# EAGLE board mmbuddy (EAGLE 9.6.2)
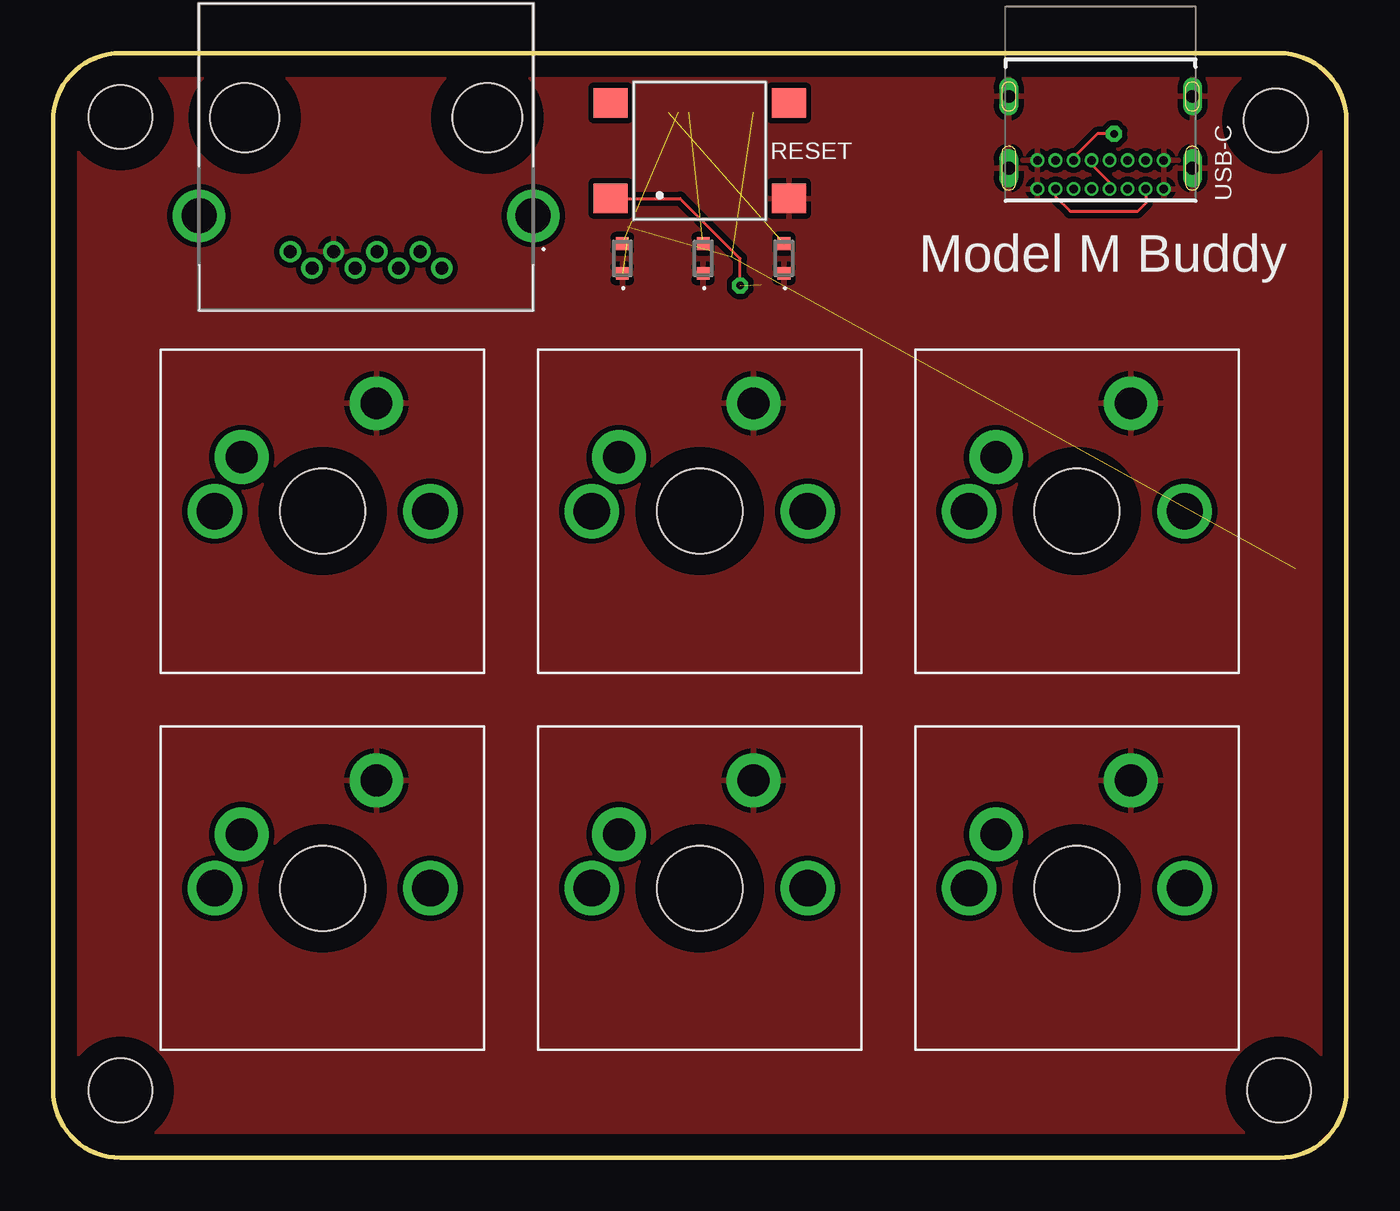
[diagram p0: board, top side]
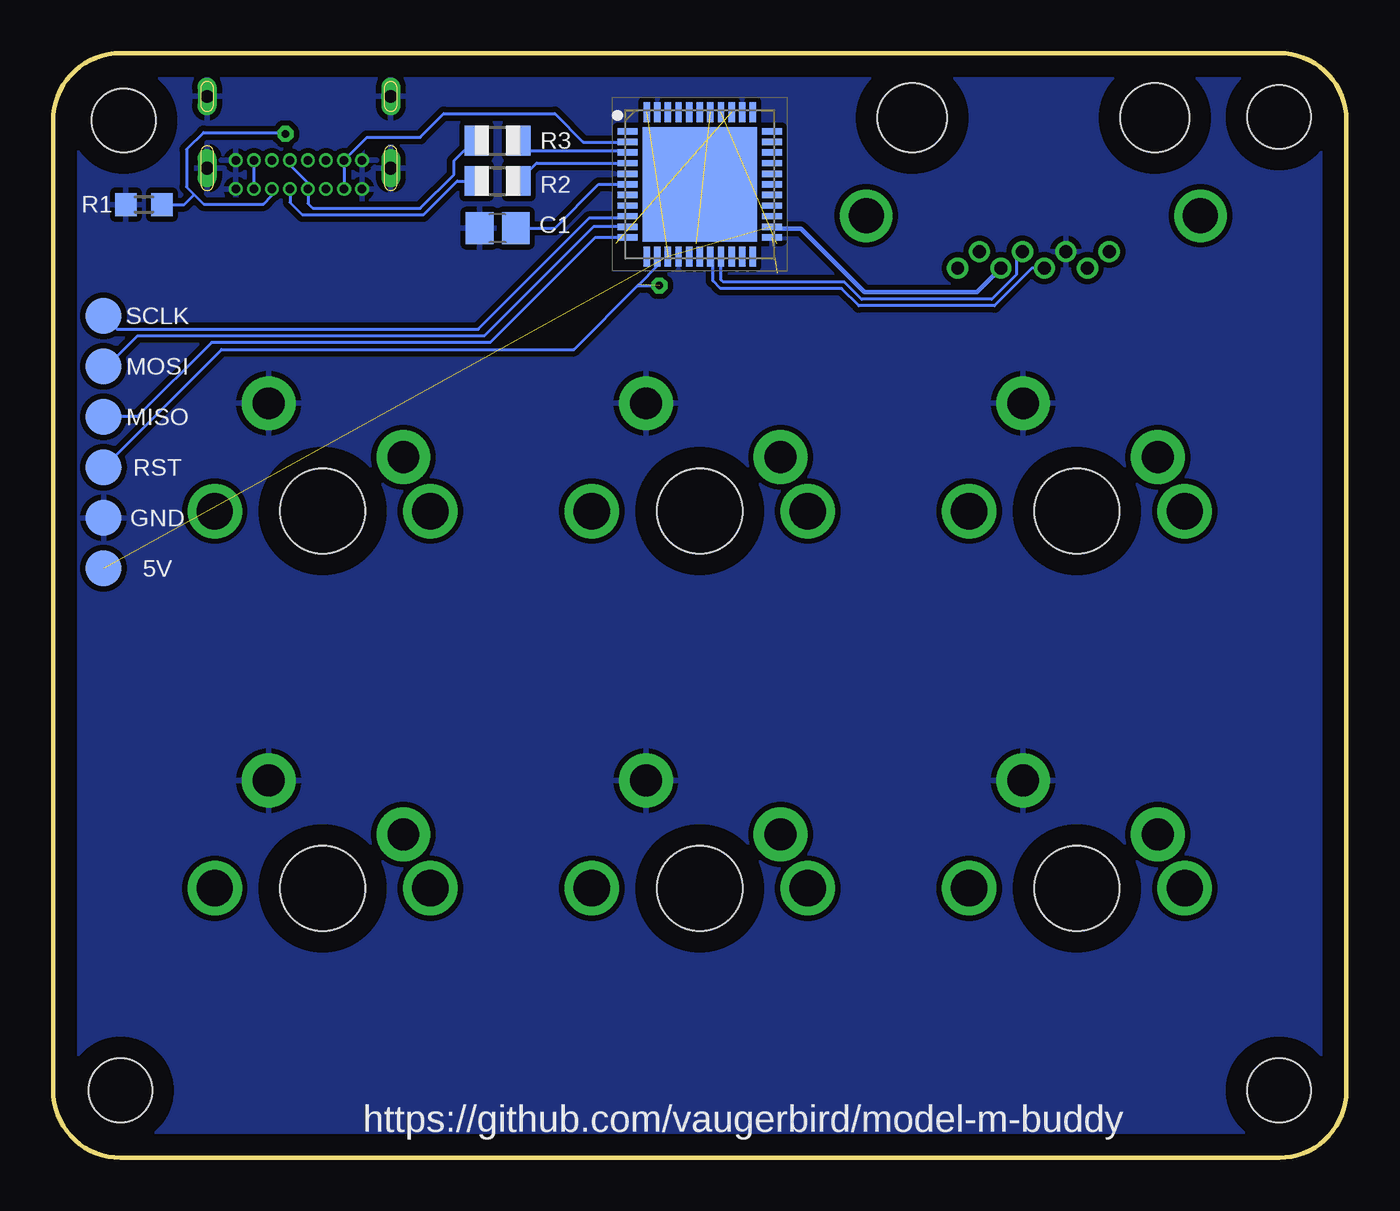
[diagram p1: board, bottom side, seen from below]

Size 60.96 x 52.07 mm. Coordinates in mm from the lower left corner, seen from the top.
Outline: 3.18,0 57.79,0 arc90 60.96,3.17 60.96,48.9 arc90 57.79,52.07 3.18,52.07 arc90 0,48.9 0,3.17 arc90 3.18,0
Copper layers (1*16): Top 0.035mm / dielectric 1.5mm / Bottom 0.035mm
Design rules "default *": minimum track width 6mil, minimum drill 0.35mm, track to track 6mil, track to pad 6mil, pad to pad 6mil, via to via 6mil, smd to smd 6mil, copper to edge 40mil, drill to drill 6mil, minimum pad ring 4mil, minimum via ring 8mil, stop-mask expansion 4mil, vias tented up to drill 0mil, thermal gap 10mil
Holes 3 mm at 57.79,3.17 57.63,48.9 3.18,3.17 3.18,49.05

## Footprints (pad centres in the part's own frame; a part is rotated, then mirrored left to right if it is on the bottom)
TP17R = smd 1.7 x 1.7: TP 0,0
C0805 = smd 1.3 x 1.5: 1 -0.85,0; 2 0.85,0
155060GS75300 = smd 0.6 x 0.6: 1 -0.7,0; 2 0.7,0
QFN50P700X700X100-45N = smd 0.95 x 0.3: 1 -3.4,2.5; 2 -3.4,2; 3 -3.4,1.5; 4 -3.4,1; 5 -3.4,0.5; 6 -3.4,0; 7 -3.4,-0.5; 8 -3.4,-1; 9 -3.4,-1.5; 10 -3.4,-2; 11 -3.4,-2.5; 23 3.4,-2.5; 24 3.4,-2; 25 3.4,-1.5; 26 3.4,-1; 27 3.4,-0.5; 28 3.4,0; 29 3.4,0.5; 30 3.4,1; 31 3.4,1.5; 32 3.4,2; 33 3.4,2.5 | smd 0.3 x 0.95: 12 -2.5,-3.4; 13 -2,-3.4; 14 -1.5,-3.4; 15 -1,-3.4; 16 -0.5,-3.4; 17 0,-3.4; 18 0.5,-3.4; 19 1,-3.4; 20 1.5,-3.4; 21 2,-3.4; 22 2.5,-3.4; 34 2.5,3.4; 35 2,3.4; 36 1.5,3.4; 37 1,3.4; 38 0.5,3.4; 39 0,3.4; 40 -0.5,3.4; 41 -1,3.4; 42 -1.5,3.4; 43 -2,3.4; 44 -2.5,3.4 | smd 5.4 x 5.4: 45 0,0
SS60300046 = drill 0.61 pad 1: 1 0,0; 2 1.02,-0.77; 3 -1.02,-0.77; 4 -3.06,-0.77; 5 -2.04,0; 6 -4.08,0; 7 -6.12,0; 8 -5.1,-0.77 | drill 1.65 pad 2.475: MH1 -10.425,1.7; MH2 5.325,1.7 | hole 3.25: 3.165,6.32; -8.265,6.32
R0603 = smd 1 x 1.1: 1 -0.85,0; 2 0.85,0
R0805 = smd 1.1 x 1.4: 1 -1,0; 2 1,0
LL3303F065QG = smd 1.6 x 1.4: 1 -4.2,-2.25; 2 4.2,-2.25; 3 -4.2,2.25; 4 4.2,2.25
CHERRY-MX = drill 1.714 pad 1.93: P$3 -5.08,0; P$4 5.08,0 | drill 1.5 pad 2.54: SW1 -3.81,2.54; SW2 2.54,5.08 | hole 4: 0,0
GCT_USB4085-GF-A_REVA = drill 0.4 pad 0.65: A1 -2.975,4.025; A4 -2.125,4.025; A5 -1.275,4.025; A6 -0.425,4.025; A7 0.425,4.025; A8 1.275,4.025; A9 2.125,4.025; A12 2.975,4.025; B1 2.975,2.675; B4 2.125,2.675; B5 1.275,2.675; B6 0.425,2.675; B7 -0.425,2.675; B8 -1.275,2.675; B9 -2.125,2.675; B12 -2.975,2.675 | drill 0.6 long: P1 -4.325,3.045; P2 4.325,3.045; P3 4.325,-0.335; P4 -4.325,-0.335

## Placement (x,y rotation side)
5V  TPTP17R  [TP17R]  58.58,27.78 0 bottom
C1  1uF  [C0805]  40.01,43.82 180 bottom
CAPS  155060GS75300  [155060GS75300]  30.64,42.39 90 top
GND  TPTP17R  [TP17R]  58.58,30.16 0 bottom
IC2  ATMEGA32U4-MU  [QFN50P700X700X100-45N]  30.48,45.88 0 bottom
J2  SS-60300-046  [SS60300046]  17.3,42.7 0 top
MISO  TPTP17R  [TP17R]  58.58,34.93 0 bottom
MOSI  TPTP17R  [TP17R]  58.58,37.31 0 bottom
NUM  155060GS75300  [155060GS75300]  26.83,42.39 90 top
R1  5.1k  [R0603]  56.67,44.93 180 bottom
R2  22Ω  [R0805]  40.01,46.04 0 bottom
R3  22Ω  [R0805]  40.01,47.94 0 bottom
RESET  LL3303F065QG  [LL3303F065QG]  30.48,47.47 0 top
RST  TPTP17R  [TP17R]  58.58,32.54 0 bottom
SCLK  TPTP17R  [TP17R]  58.58,39.69 0 bottom
SCROLL  155060GS75300  [155060GS75300]  34.45,42.39 90 top
SW1  CHERRY-MX  [CHERRY-MX]  12.7,30.48 0 top
SW2  CHERRY-MX  [CHERRY-MX]  30.48,30.48 0 top
SW3  CHERRY-MX  [CHERRY-MX]  48.26,30.48 0 top
SW4  CHERRY-MX  [CHERRY-MX]  12.7,12.7 0 top
SW5  CHERRY-MX  [CHERRY-MX]  30.48,12.7 0 top
SW6  CHERRY-MX  [CHERRY-MX]  48.26,12.7 0 top
USB-C  USB4085-GF-A_REVA  [GCT_USB4085-GF-A_REVA]  49.37,49.69 180 top

## Library data of the parts
5V GND MISO MOSI RST SCLK = testpad
C1 R1-R3 = adafruit
CAPS NUM SCROLL = SamacSys_Parts; DESCRIPTION: WURTH ELEKTRONIK - 155060GS75300 - LED, Green, SMD, 0603 [1608 Metric], 20 mA, 3.2 V, 525 nm; HEIGHT: 1.18mm; MANUFACTURER_NAME: Wurth Elektronik; MANUFACTURER_PART_NUMBER: 155060GS75300; MOUSER_PART_NUMBER: 710-155060GS75300; MOUSER_PRICE-STOCK: https://www.mouser.co.uk/ProductDetail/Wurth-Elektronik/155060GS75300/?qs=GedFDFLaBXH9gWG%252BJzMHAg%3D%3D
IC2 = SamacSys_Parts; DESCRIPTION: MCU 8-bit ATmega AVR RISC 32KB Flash Atmel ATMEGA32U4-MU, 8bit AVR Microcontroller, 16MHz, 32 kB Flash, 44-Pin QFN; HEIGHT: 1mm; MANUFACTURER_NAME: Microchip; MANUFACTURER_PART_NUMBER: ATMEGA32U4-MU; MOUSER_PART_NUMBER: 556-ATMEGA32U4-MU; MOUSER_PRICE-STOCK: https://www.mouser.co.uk/ProductDetail/Microchip-Technology-Atmel/ATMEGA32U4-MU?qs=JV7lzlMm3yJYRpi0cY3cKw%3D%3D
J2 = SamacSys_Parts; DESCRIPTION: Ethernet Connectors R ANG SHIELDED JACK ;SS60300046; HEIGHT: 14.33mm; MANUFACTURER_NAME: Bel; MANUFACTURER_PART_NUMBER: SS-60300-046; MOUSER_PART_NUMBER: 530-SS-60300-046
RESET = SamacSys_Parts; DESCRIPTION: Pushbutton Switches 50mA 12VDC F065 7.0mm Gull Wing; HEIGHT: 3.4mm; MANUFACTURER_NAME: E-Switch; MANUFACTURER_PART_NUMBER: LL3303F065QG; MOUSER_PART_NUMBER: 612-LL3303F065QG; MOUSER_PRICE-STOCK: https://www.mouser.co.uk/ProductDetail/E-Switch/LL3303F065QG?qs=QtyuwXswaQjocAyEnLyPSg%3D%3D
SW1-SW6 = cherrymx
USB-C = USB4085-GF-A_REVA; AVAILABILITY: Warning; DESCRIPTION: USB-C (USB TYPE-C) USB 2.0 Receptacle Connector 24 (16+8 Dummy) Position Through Hole, Right Angle; MF: Global Connector Technology; MP: USB4085-GF-A; PACKAGE: Package; PRICE: None; PURCHASE-URL: https://pricing.snapeda.com/search/part/USB4085-GF-A/?ref=eda

## Nets
CAPS: CAPS.2 IC2.38
CC: R1.1 USB-C.A5 USB-C.B5
CLK: IC2.19 J2.5
D+: R2.1 USB-C.A6 USB-C.B6
D+RES: IC2.4 R2.2
D-: R3.1 USB-C.A7 USB-C.B7
D-RES: IC2.3 R3.2
DATA: IC2.18 J2.4
GND: C1.2 CAPS.1 GND.TP IC2.5 IC2.15 IC2.23 IC2.35 IC2.43 J2.6 NUM.1 R1.2 RESET.2 SCROLL.1 SW1.SW2 SW2.SW2 SW3.SW2 SW4.SW2 SW5.SW2 SW6.SW2 USB-C.A1 USB-C.A12 USB-C.B1 USB-C.B12 USB-C.P1 USB-C.P2 USB-C.P3 USB-C.P4
MISO: IC2.11 MISO.TP
MOSI: IC2.10 MOSI.TP
NUM: IC2.37 NUM.2
RESET: IC2.13 RESET.1 RST.TP
SCLK: IC2.9 SCLK.TP
SCRL: IC2.36 SCROLL.2
SW1: SW1.SW1
SW2: SW2.SW1
SW3: SW3.SW1
SW5: SW5.SW1
SW6: SW6.SW1
UCAP: C1.1 IC2.6
VCC: 5V.TP IC2.14 IC2.24 IC2.44 J2.3
VIN: IC2.2 USB-C.A4 USB-C.A9 USB-C.B4 USB-C.B9

## Tracks (layer width: path | path; a pad name or v marks a point on that pad's centre or on a via)
CAPS  (1 unrouted)
CC  (via drill 0.35)
  Top 0.152: v50.01,48.26 49.21,48.26 48.1,47.14 USB-C.B5
  Bottom 0.152: USB-C.A5 50.65,45.35 51.04,44.96 53.86,44.96 54.3,45.39 | v50.01,48.26 50.01,48.32 53.87,48.32 54.66,47.53 54.66,45.76 54.3,45.39 | R1.1 54.77,44.93 54.3,45.39
CLK
  Bottom 0.152: J2.5 15.55,42.41 15.55,41.63 16.72,40.47 22.86,40.47 23.66,41.27 29.37,41.27 29.48,41.39 IC2.19
D+
  Top 0.152: USB-C.B6 48.95,46.83 | 48.95,46.83 48.95,46.78 | 49.8,45.94 USB-C.A6 49.8,45.98 48.95,46.83
  Bottom 0.152: USB-C.A6 49.8,45.03 49.22,44.45 43.5,44.45 41.91,46.04 R2.1
D+RES
  Bottom 0.152: R2.2 38.16,46.88 IC2.4
D-
  Bottom 0.152: USB-C.B7 49.8,46.78 48.95,45.93 USB-C.A7 | USB-C.A7 48.95,45.94 | USB-C.A7 48.95,44.98 48.72,44.76 43.66,44.76 42.07,46.34 42.07,46.99 41.12,47.94 R3.1
D-RES
  Bottom 0.152: 38.77,48.17 R3.2 38.53,47.47 33.97,47.47 IC2.3
DATA
  Bottom 0.152: IC2.18 29.86,42.36 29.86,41.33 29.49,40.97 23.79,40.97 22.98,40.16 16.59,40.16 14.82,41.93 J2.4
GND  (1 unrouted)
  pour Top (isolate 0.254): 0,0 0,52.07 60.96,52.07 60.96,0
  pour Bottom (isolate 0.254): 0,52.07 0,0 60.96,0 60.96,52.07
MISO
  Bottom 0.152: 58.42,34.77 MISO.TP 56.99,34.93 53.49,38.43 40.35,38.43 35.41,43.38 IC2.11
MOSI
  Bottom 0.152: MOSI.TP 58.5,37.23 56.99,38.73 40.64,38.73 35.5,43.88 IC2.10
NUM  (1 unrouted)
RESET  (via drill 0.35)  (1 unrouted)
  Top 0.152: 26.28,44.74 RESET.1 29.55,45.22 32.38,42.39 v32.38,41.12
  Bottom 0.152: IC2.13 32.42,42.42 32.44,42.39 32.44,42.07 33.39,41.12 v32.38,41.12 | 58.26,32.86 RST.TP 53.02,38.1 36.41,38.1 33.37,41.15
SCLK
  Bottom 0.152: 33.95,44.45 IC2.9 33.98,44.28 35.7,44.28 40.93,39.05 57.94,39.05 SCLK.TP
SCRL  (1 unrouted)
UCAP
  Bottom 0.152: C1.1 37.31,43.82 35.24,45.88 IC2.6
VCC  (3 unrouted)
  Bottom 0.203: IC2.24 26.98,43.78 25.71,43.78 22.72,40.8 17.42,40.8 J2.3
VIN
  Top 0.152: USB-C.A4 51.5,44.99 51.12,44.61 47.94,44.61 47.25,45.3 USB-C.A9
  Bottom 0.152: USB-C.A9 USB-C.B4 46.16,48.1 43.66,48.1 42.54,49.21 37.31,49.21 35.97,47.88 IC2.2 | USB-C.B9 USB-C.A4

## Text on the board
tNames: Model M Buddy
bNames: https://github.com/vaugerbird/model-m-buddy